# Altium PCB DB.PcbDoc
Units mil, origin at the board's own origin, x right, y up, seen from the top; angles counter-clockwise.
Board outline 1930 x 1770 mil, 2 copper layers (Top Layer, Bottom Layer); 26 components, 9 nets, 64 pads, 0 vias.
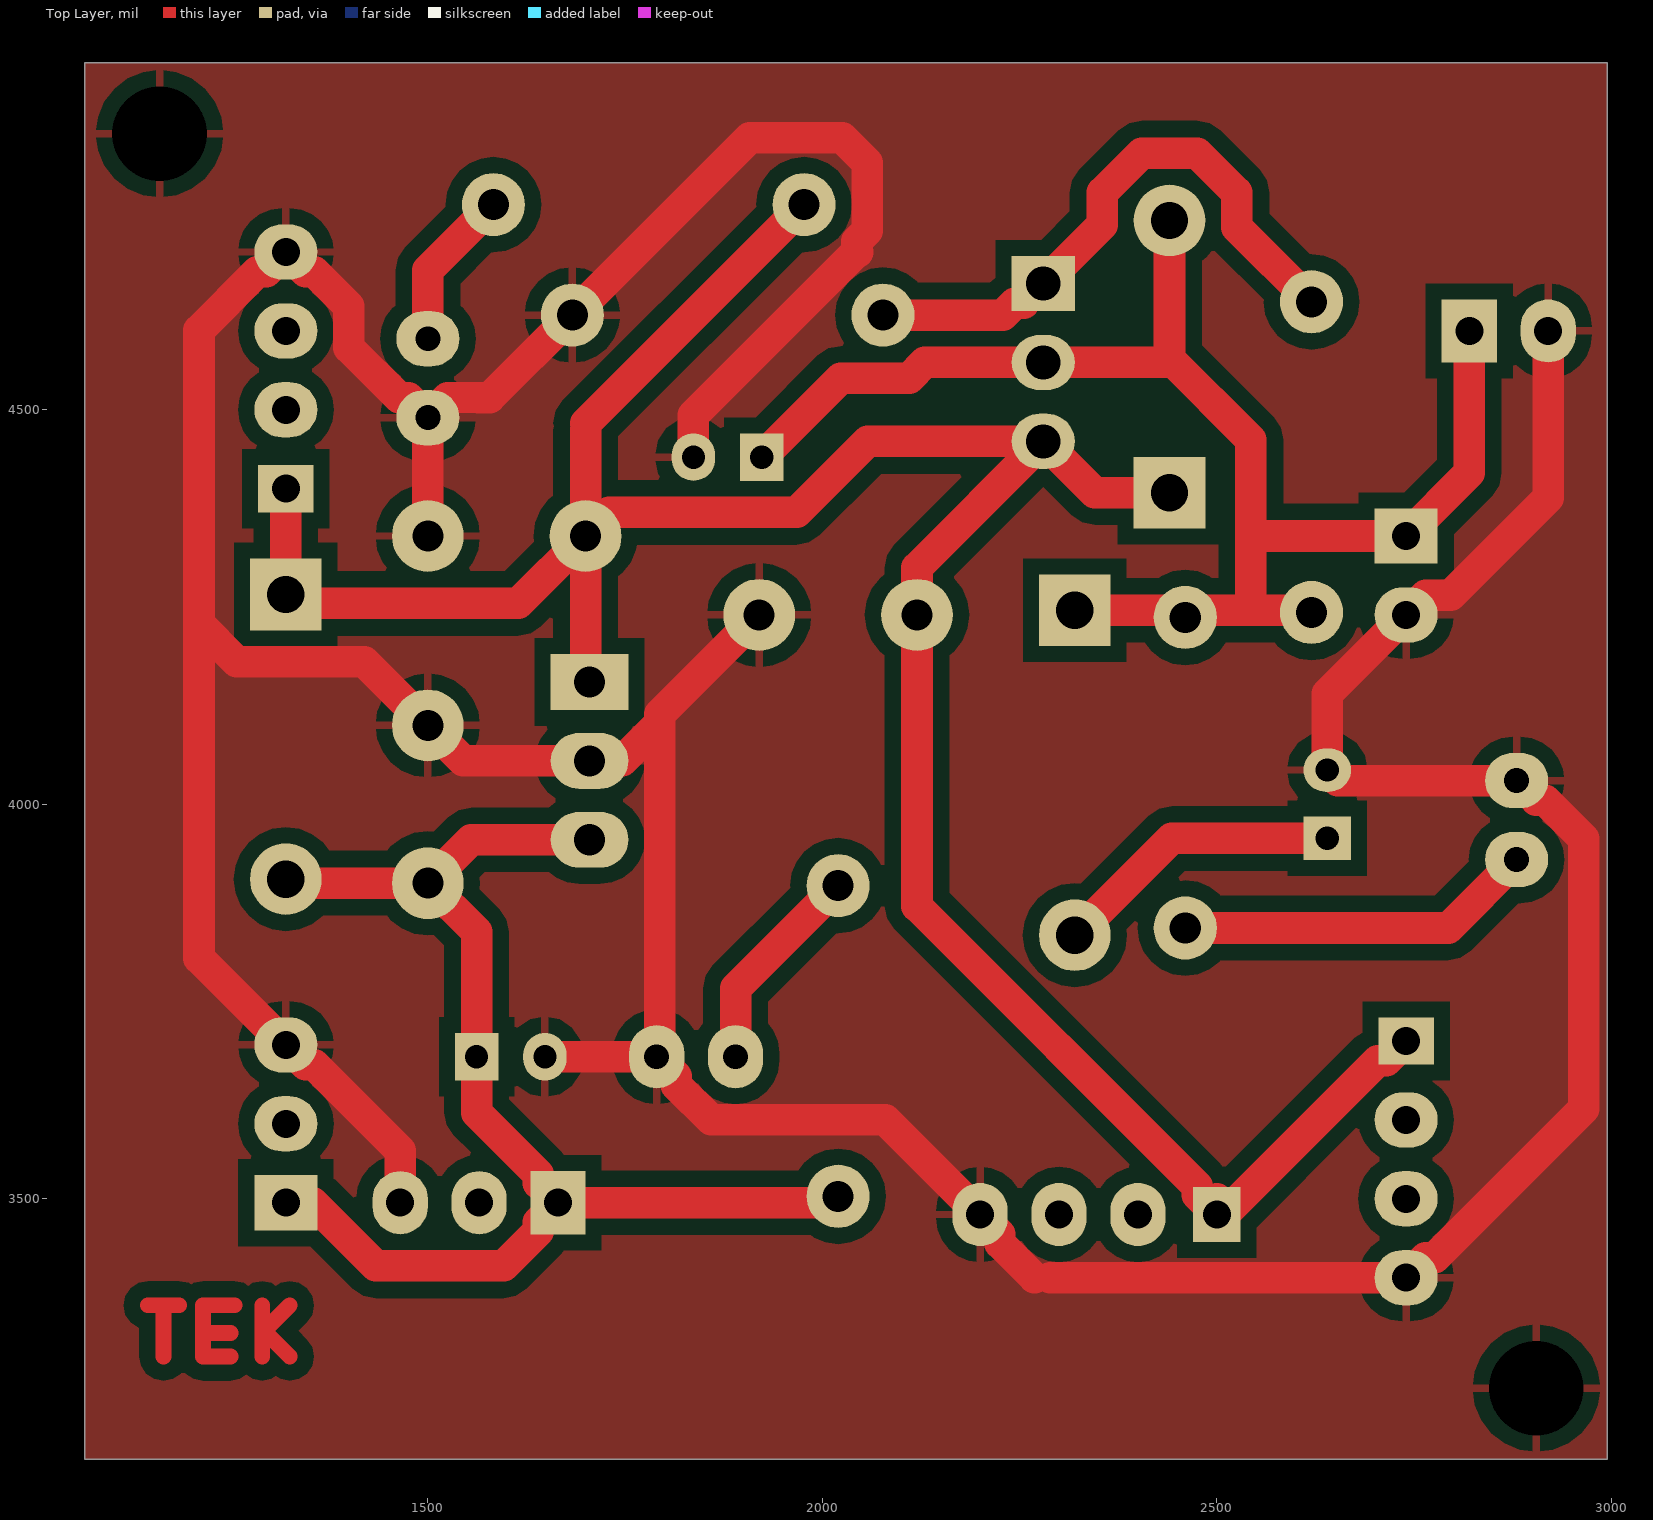
[diagram p0: Top Layer view]
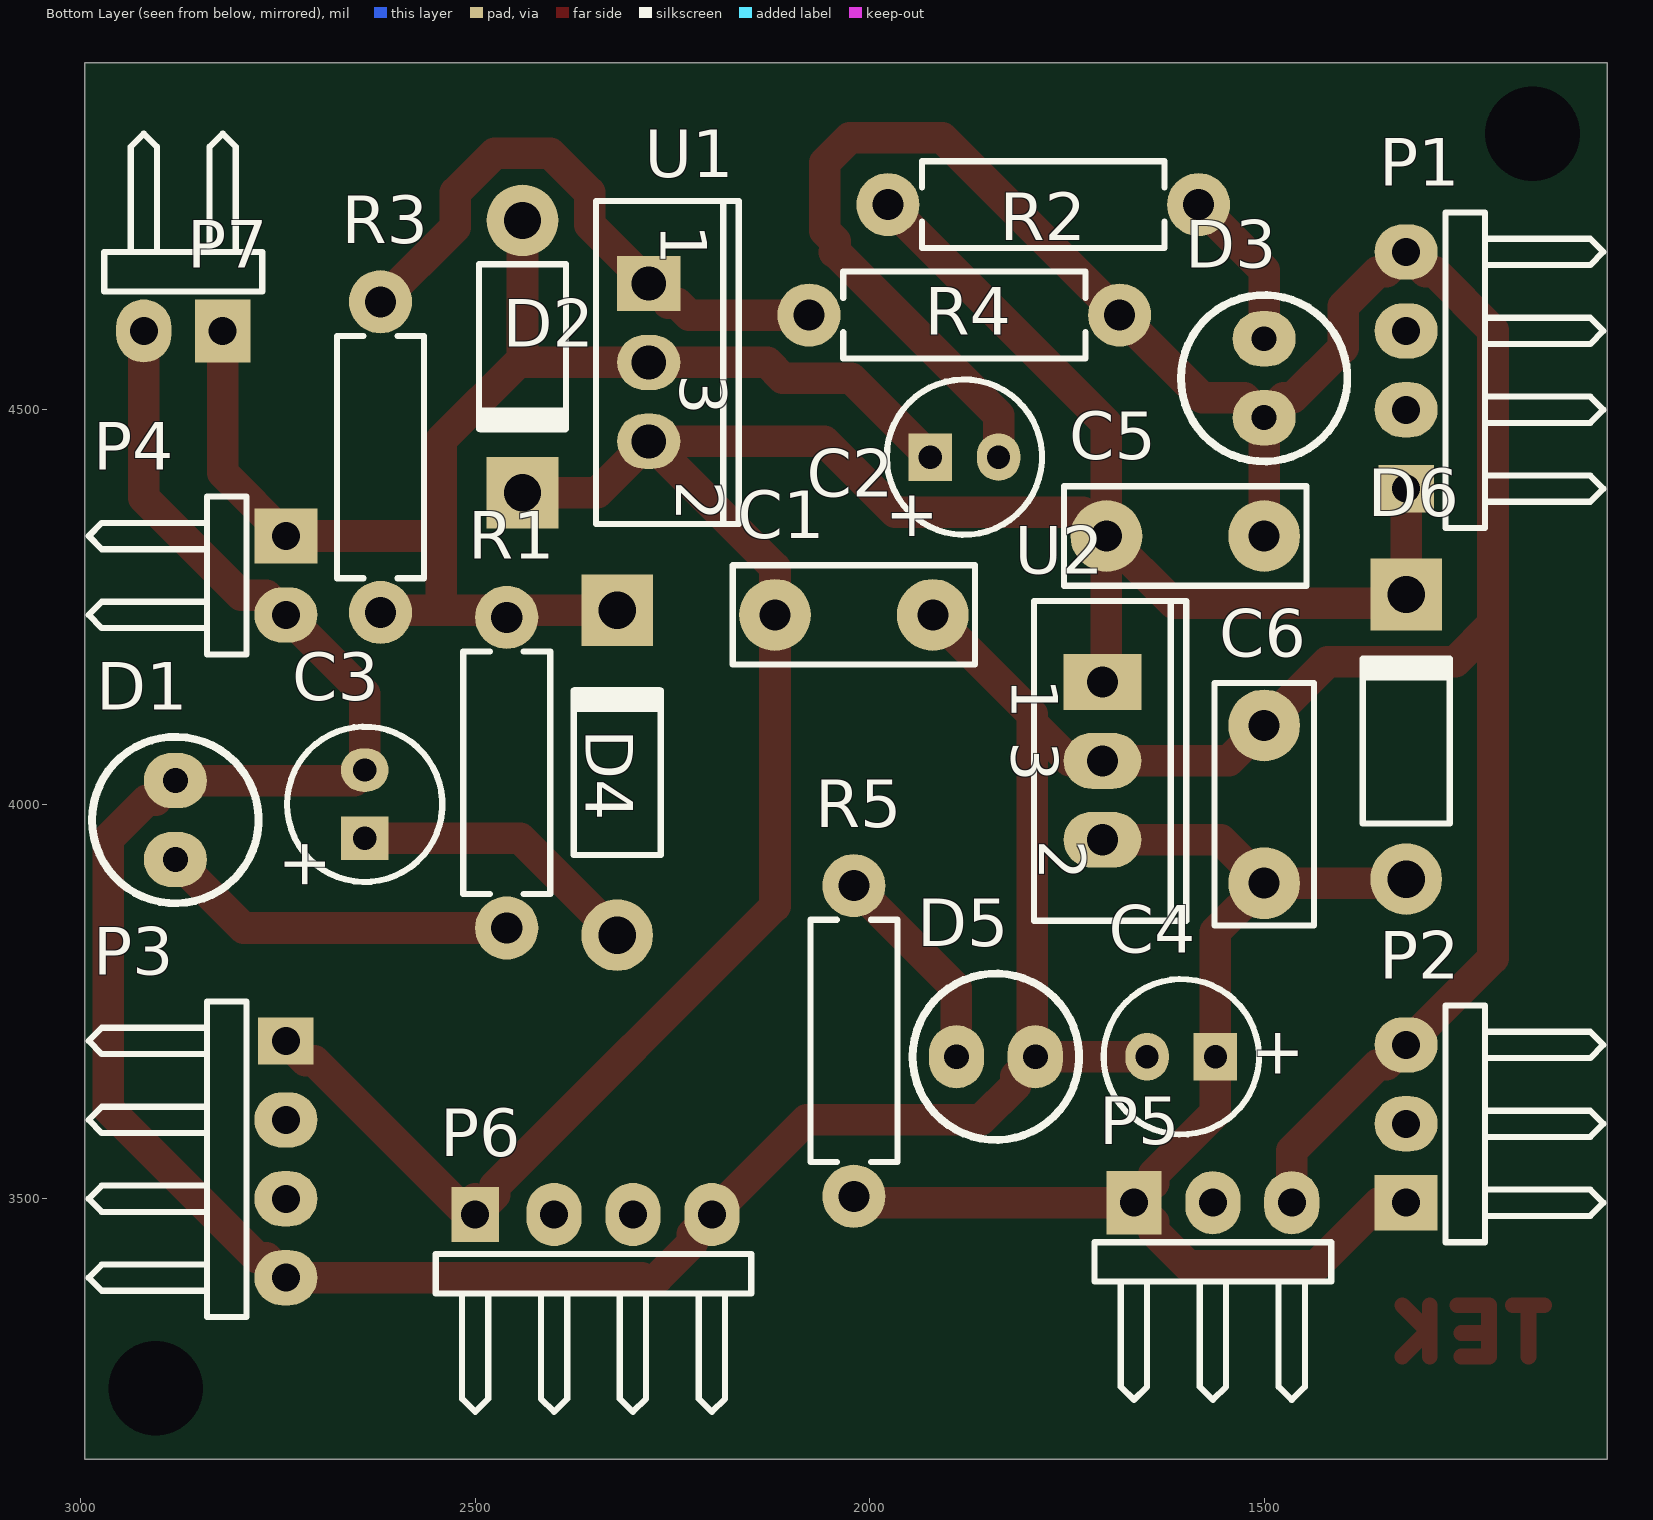
[diagram p1: Bottom Layer view, seen from below]

## Layer stack, top to bottom
Top Layer: signal copper 1.4
Dielectric: dielectric 12.6, FR-4, Dk 4.8
Bottom Layer: signal copper 1.4

## Board outline
1065,4940 2995,4940 2995,3170 1065,3170

## Design rules (kind name [scope] priority, off if disabled: settings)
Clearance [All] p1: gap=20
PolygonConnect [All] p1: connectstyle=Relief reliefconductorwidth=10 reliefentries=4 polygonreliefangle="90 Angle"
RoomDefinition DB [InComponentClass('DB')] p1: confinementstyle=ConfineIn formatcopy=TRUE lockcomponents=FALSE outline 1065,3170 2995,3170 2995,4940 1065,4940
RoutingVias [All] p1: holewidth=28 width=50 viastyle="Through Hole" minholewidth=28 minwidth=50 maxholewidth=28 maxwidth=50
SilkscreenOverComponentPads [All] p1: minsilkscreentomaskgap=10
SolderMaskExpansion [All] p1: expansion=4
Width [All] p1: maxlimit=40 minlimit=20 preferedwidth=40
27 further rules are at their usual default settings.

## Components (designator, comment, footprint, x,y, rotation, side; value= is the part's Value field where it differs from the comment)
C1 "Cap" CAPR5.08-7.8x3.2 2020,4240 r180 bottom
C2 "Cap Pol1" CAPPR2-5x6.8 1880,4440 r180 bottom
C3 "Cap Pol1" CAPPR2-5x6.8 2640,4000 r90 bottom
C4 "Cap Pol1" CAPPR2-5x6.8 1605,3680 r0 bottom
C5 "Cap" CAPR5.08-7.8x3.2 1600,4340 r180 bottom
C6 "Cap" CAPR5.08-7.8x3.2 1500,4000 r90 bottom
D1 "LED1" LED-1 2880,3980 r0 bottom
D2 "Diode 1N4001" DIO10.46-5.3x2.8#1 2440,4580 r270 bottom
D3 "LED1" LED-1 1500,4540 r180 bottom
D4 "Diode 1N4001" DIO10.46-5.3x2.8#2 2320,4040 r90 bottom
D5 "LED1" LED-1 1840,3680 r90 bottom
D6 "Diode 1N4001" DIO10.46-5.3x2.8#3 1320,4080 r90 bottom
P1 "Header 4H" HDR1X4H 1320,4400 r90 bottom
P2 "Header 3H" HDR1X3H 1320,3495 r90 bottom
P3 "Header 4H" HDR1X4H 2740,3700 r270 bottom
P4 "Header 2H" HDR1X2H 2740,4340 r270 bottom
P5 "Header 3H" HDR1X3H 1665,3495 r180 bottom
P6 "Header 4H" HDR1X4H 2500,3480 r180 bottom
P7 "Header 2H" HDR1X2H 2820,4600 r0 bottom
R1 "Res Semi" RES10-7.8X2.8 2460,4040 r270 bottom
R2 "Res Semi" RES10-7.8X2.8 1780,4760 r180 bottom
R3 "Res Semi" RES10-7.8X2.8 2620,4440 r270 bottom
R4 "Res Semi" RES10-7.8X2.8 1880,4620 r0 bottom
R5 "Res Semi" RES10-7.8X2.8 2020,3700 r90 bottom
U1 "LM317T" TO220ABN 2280,4560 r270 bottom
U2 "L7805CP" 221A-04 1705,4055 r270 bottom

## Footprints (in the part's own frame and the unit in brackets; to place one, negate y for a bottom-side part, rotate by r counter-clockwise, add the part's x,y. Pads: shape width x height; smd on the part's side, far side on the other; paste and mask are expansions set on the pad)
221A-04 [mm]
  rect 1.8x2.5 hole 1: 1(-2.54,0)
  oval 1.8x2.5 hole 1: 2(2.54,0) 3(0,0)
  silkscreen extent -5.15,-2.2 5.15,2.7
CAPPR2-5x6.8 [mm]
  rect 1.402x1.529 hole 0.75: 1(-1.098,0)
  oval 1.402x1.529 hole 0.75: 2(1.102,0)
  silkscreen extent -2.5,-2.5 2.5,2.5
CAPR5.08-7.8x3.2 [mm]
  round 2.31 hole 1: 1(-2.54,0) 2(2.54,0)
  silkscreen extent -3.9,-1.6 3.9,1.6
DIO10.46-5.3x2.8#1 [mil]
  round 90.74 hole 47.24: 1(-160,0)
  rect 90.74x90.74 hole 47.24: 2(185,0)
  silkscreen extent -104,-55 109,56
DIO10.46-5.3x2.8#2 [mil]
  round 90.74 hole 47.24: 1(-205.91,0)
  rect 90.74x90.74 hole 47.24: 2(205.91,0)
  silkscreen extent -104,-55 108,55
DIO10.46-5.3x2.8#3 [mil]
  round 90.74 hole 47.24: 1(-174.91,0)
  rect 90.74x90.74 hole 47.24: 2(185.9,0)
  silkscreen extent -104,-55 108,55
HDR1X2H [mil] "Connector; Header; 2 Position; Right Angle"
  rect 70x80 hole 35.43: 1(0,0)
  oval 70x80 hole 35.43: 2(100,0)
  silkscreen extent -50,-250 150,-50
HDR1X3H [mil] "Connector; Header; 3 Position; Right Angle"
  rect 70x80 hole 35.43: 1(0,0)
  oval 70x80 hole 35.43: 2(100,0) 3(200,0)
  silkscreen extent -50,-250 250,-50
HDR1X4H [mil] "Connector; Header; 4 Position; Right Angle"
  rect 60x70 hole 35.43: 1(0,0)
  oval 70x80 hole 35.43: 2(100,0) 3(200,0) 4(300,0)
  silkscreen extent -50,-250 350,-50
LED-1 [mil] "Typical RED GaAs LED; 2 Leads"
  oval 80x70 hole 31.5: 1(0,50) 2(0,-50)
  silkscreen extent -105,-105 105,105
RES10-7.8X2.8 [mil]
  round 80 hole 39.37: 1(-196.85,0) 2(196.85,0)
  silkscreen extent -154,-55 154,55
TO220ABN [mil] "TO, Thru-Hole, Vertical, Heatsink Mounted; 3 In-Line Leads; Pitch 2.54 mm; Pin sequence 1, 3, 2"
  rect 70x80 hole 43.31: 1(-100,0)
  oval 70x80 hole 43.31: 2(100,0) 3(0,0)
  silkscreen extent -205,-67 205,114

## Part data
C1 C5 C6: "Capacitor"
C2 C3 C4: "Polarized Capacitor (Radial)"
D1 D3 D5: "Typical RED GaAs LED"
D2 D4 D6: library part "Diode 1N4007", "1 Amp General Purpose Rectifier"
P1 P3 P6: "Header, 4-Pin, Right Angle"
P2 P5: "Header, 3-Pin, Right Angle"
P4 P7: "Header, 2-Pin, Right Angle"
R1 R2 R3 R4 R5: "Semiconductor Resistor"
U1: "1.2V to 37V Voltage Regulator"
U2: "Positive Voltage Regulator"

## Free pads (board coordinates)
  round 0 hole 120: 0(1160,4850) 1(2905,3260)

## Nets (pads, with @x,y where several pads share a name; then routed paths per layer and width w, separated by ;. In a path a pad name is that pad's centre, name@x,y a point inside that pad or via, vN(x,y) a via of type N, cw(c..) or ccw(c..) an arc to the next point about the centre after c; other vN are vias at no path point)
3.3V: C2.1 D2.1 D4.2 P4.1 P7.1 R1.1 R3.2 U1.3 | length 1873.3
  Top Layer w40: C2.1 2023.23,4540 2109.99,4540 2129.99,4560 U1.3 2435,4560 2440,4565 ; D4.2@2329.06,4245.91 2480,4245.91 2617.24,4245.91 R3.2 ; D2.1 2440,4565 ; 2543.15,4260 2543.15,4340 ; P7.1 2820,4420 P4.1 2543.15,4340 ; 2440,4565 2543.15,4461.85 2543.15,4340
5V: C4.1 C6.1 D6.1 P2.1 P5.1 R5.1 U2.2 | length 1640.6
  Top Layer w40: P2.1 1353.93,3495 1433.93,3415 1596.07,3415 1640,3458.93 1640,3470 P5.1 ; D6.1@1325.1,3900 C6.1 ; U2.2 1555,3955 C6.1 ; R5.1@2011.85,3495 P5.1 ; C6.1 1561.77,3838.23 1561.77,3695 1561.77,3609.29 1640,3531.07 1640,3520 P5.1
12V: C1.1 C5.1 D2.2 D6.2 P1.1 P3.1 P6.1 R2.1 U1.2 U2.1 | length 3680.5
  Top Layer w40: P1.1 1320,4240.91 1333.61,4254.52 1614.52,4254.52 C5.1 ; 1700,4475 C5.1 ; 1700,4483.15 R2.1 ; U2.1 1700,4160 C5.1 ; C5.1@1705.37,4345.37 C5.1 ; U1.2@2274.52,4454.52 U1.2 ; D2.2 2345,4395 U1.2 ; P6.1@2500,3500 P6.1 ; P3.1 2715,3675 2703.93,3675 2508.93,3480 P6.1 ; C5.1 1729.89,4369.89 1967.4,4369.89 2057.51,4460 U1.2 ; U1.2 2120,4300 C1.1 2120,3871.07 2475,3516.07 2475,3505 P6.1
GND: C1.2 C2.2 C3.2 C4.2 C5.2 C6.2 D1.2 D3.2 D5.2 P1.4 P2.3 P3.4 P4.2 P5.3 P6.4 P7.2 pad.0 pad.1 R4.1 U2.3 | length 7162.5
  Top Layer w40: P5.3 1465,3561.07 1356.07,3670 1345,3670 P2.3 1210,3805 1210,4228.6 ; C5.2 D3.2 ; C4.2 D5.2 ; C2.2 1836.61,4492.9 2043.71,4700 ; C1.2 1794.21,4114.21 1794.21,4103 ; 2045,4700 2043.71,4700 ; 2268.93,3400 2225,3443.93 2225,3455 P6.4 2080,3600 1858.93,3600 1815,3643.93 1815,3655 D5.2 ; 2288.93,3400 P3.4 2765,3425 2776.07,3425 2965,3613.93 2965,3956.07 2916.07,4005 D1.2@2905,4005 ; D1.2 2653.39,4030 C3.2 2640,4140 P4.2 2765,4265 2796.57,4265 2920,4388.43 P7.2 ; 1210,4228.6 1210,4275 1210,4601.07 1283.93,4675 1295,4675 P1.4 1345,4675 1356.07,4675 1400,4631.07 1400,4578.93 1463.93,4515 1475,4515 D3.2 ; 1210,4228.6 1258.06,4180.53 1419.46,4180.53 C6.2 1545,4055 U2.3 1746.21,4055 1794.21,4103 ; D3.2 1525,4515 1578.15,4515 R4.1 1908.15,4845 2025,4845 2056.85,4813.15 2056.85,4726.86 2043.71,4713.73 2043.71,4700 ; D5.2 1794.21,3684.21 1794.21,4103
NetC3_1: C3.1 D4.1 | length 370.8
  Top Layer w40: D4.1 2442.68,3956.77 C3.1
NetD1_1: D1.1 R1.2 | length 456
  Top Layer w40: R1.2 2793.15,3843.15 D1.1
NetD3_1: D3.1 R2.2 | length 204.4
  Top Layer w40: D3.1 1500,4676.85 R2.2
NetD5_1: D5.1 R5.2 | length 270.7
  Top Layer w40: D5.1 1890,3766.85 R5.2
NetR3_1: R3.1 R4.2 U1.1 | length 720.5
  Top Layer w40: R4.2 2228.93,4620 2243.93,4635 U1.1@2255,4635 ; U1.1 2354.63,4734.63 2354.63,4775.36 2404.64,4825.37 2475.36,4825.37 2525.37,4775.36 2525.37,4731.48 R3.1
pads on no net: P1.2 P1.3 P2.2 P3.2 P3.3 P5.2 P6.2 P6.3
copper on no net: | length 451.9
  Top Layer w20: 1155,3365 1145,3365 1185,3365 ; 1165,3300 1165,3365 ; 1250,3300 1215,3300 1215,3330 ; 1250,3330 1215,3330 ; 1255,3365 1215,3365 1215,3330 ; 1290,3300 1290,3330 ; 1290,3365 1290,3330 ; 1325,3300 1295,3330 1290,3330 ; 1325,3365 1290,3330

## Polygon pours and split planes (outlines as drawn)
GND on Top Layer "Top Layer-No Net" (solid, remove dead copper, pour order 1000): 1065,3170 2995,3170 2995,4940 1065,4940

## Text inside footprints (layer, text, board x,y; h text height)
C2: Bottom Overlay "+" at 1980,4340 h59.06
C3: Bottom Overlay "+" at 2690,3890 h59.06 r270
C4: Bottom Overlay "+" at 1448.5,3709.53 h59.06 r180
U1: Bottom Overlay "1" at 2265,4735 h59.06 r90; Bottom Overlay "2" at 2245,4410 h59.06 r90; Bottom Overlay "3" at 2240,4545 h59.06 r90
U2: Bottom Overlay "3" at 1820,4080 h59.06 r90; Bottom Overlay "2" at 1785,3955 h59.06 r90; Bottom Overlay "1" at 1820,4160 h59.06 r90